# Altium PCB PinWheelV2.PcbDoc
Units mil, origin at the board's own origin, x right, y up, seen from the top; angles counter-clockwise.
Board outline 4725 x 5550 mil, 2 copper layers (Top Layer, Bottom Layer); 126 components, 95 nets, 421 pads, 10 vias.
Unrouted connection lines stored in the file: 78.
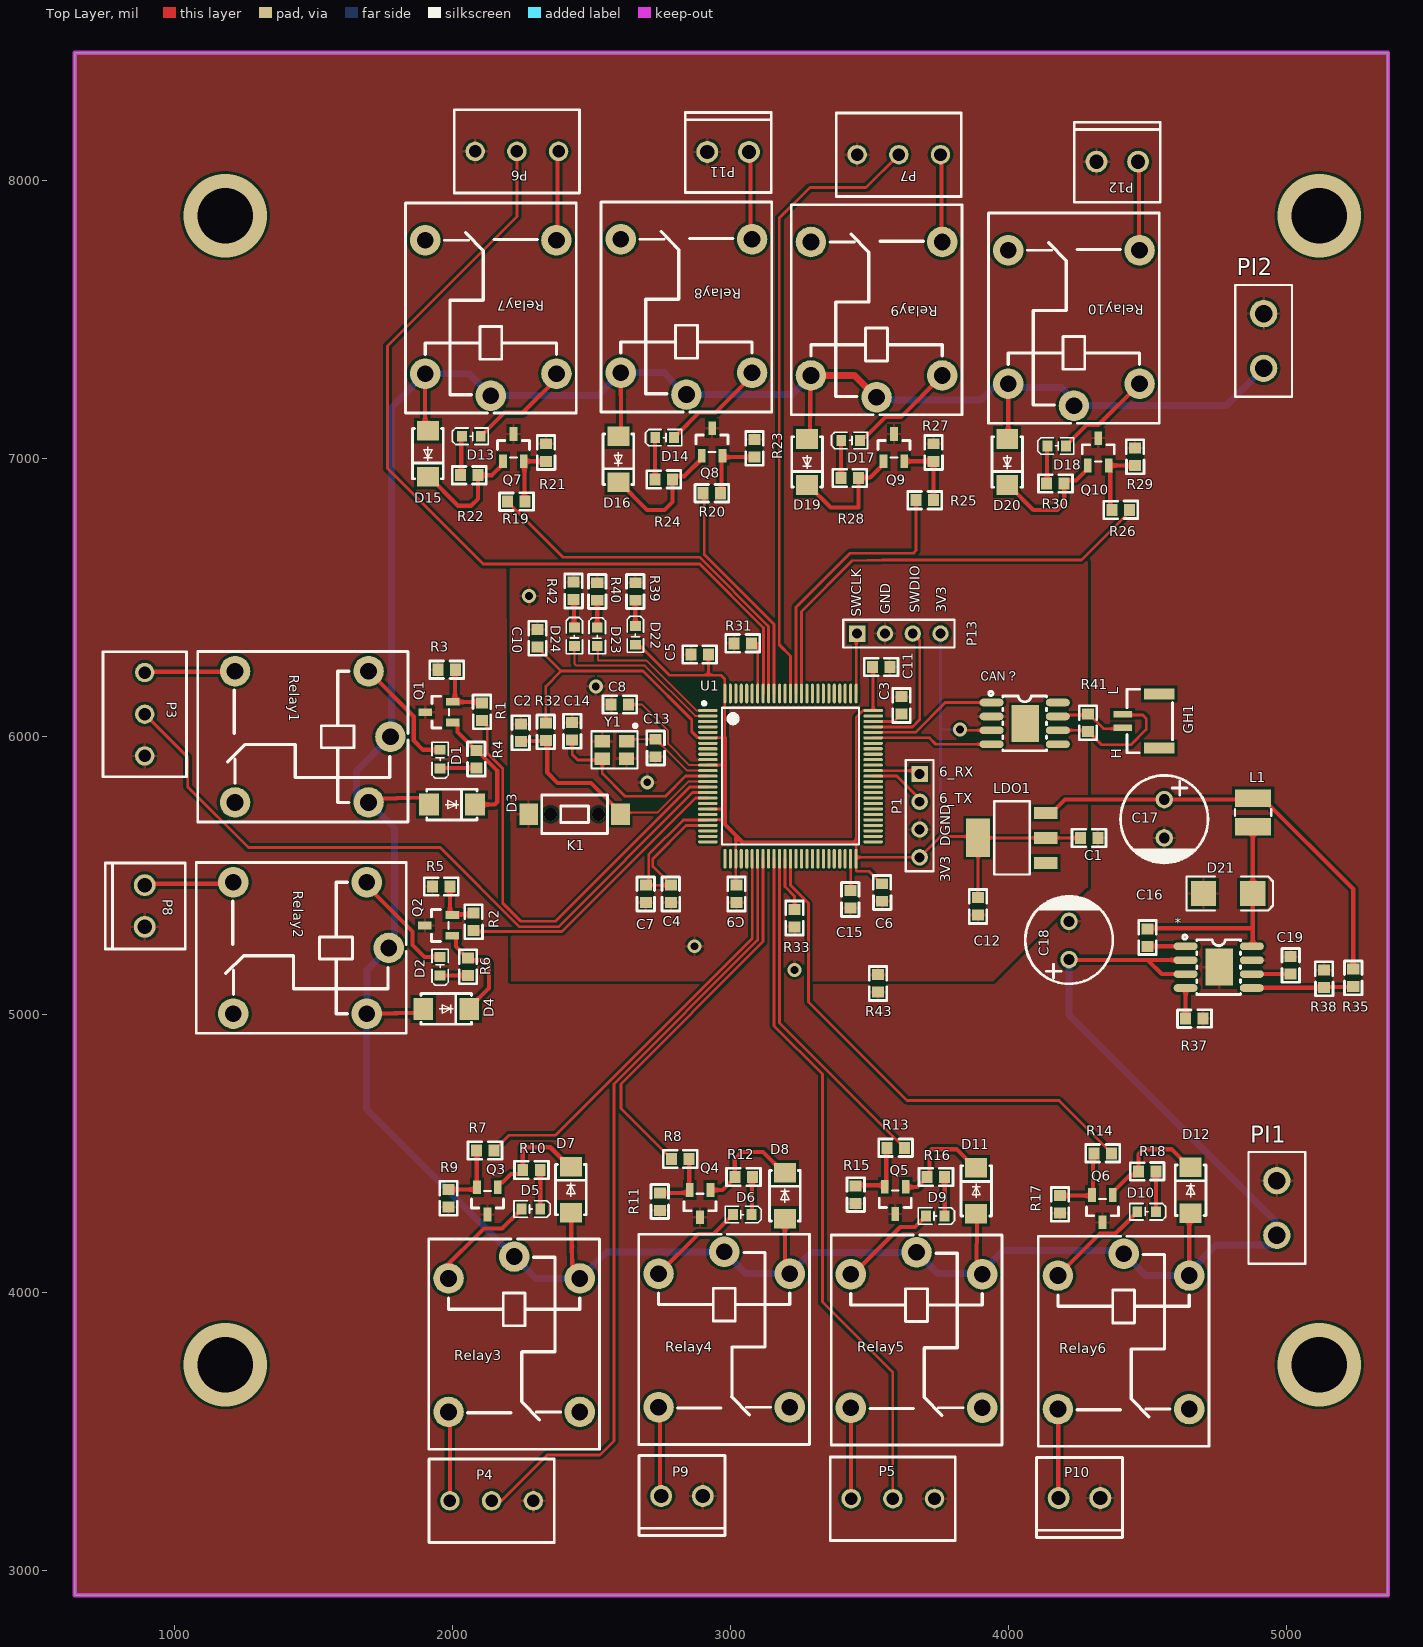
[diagram p0: Top Layer view]
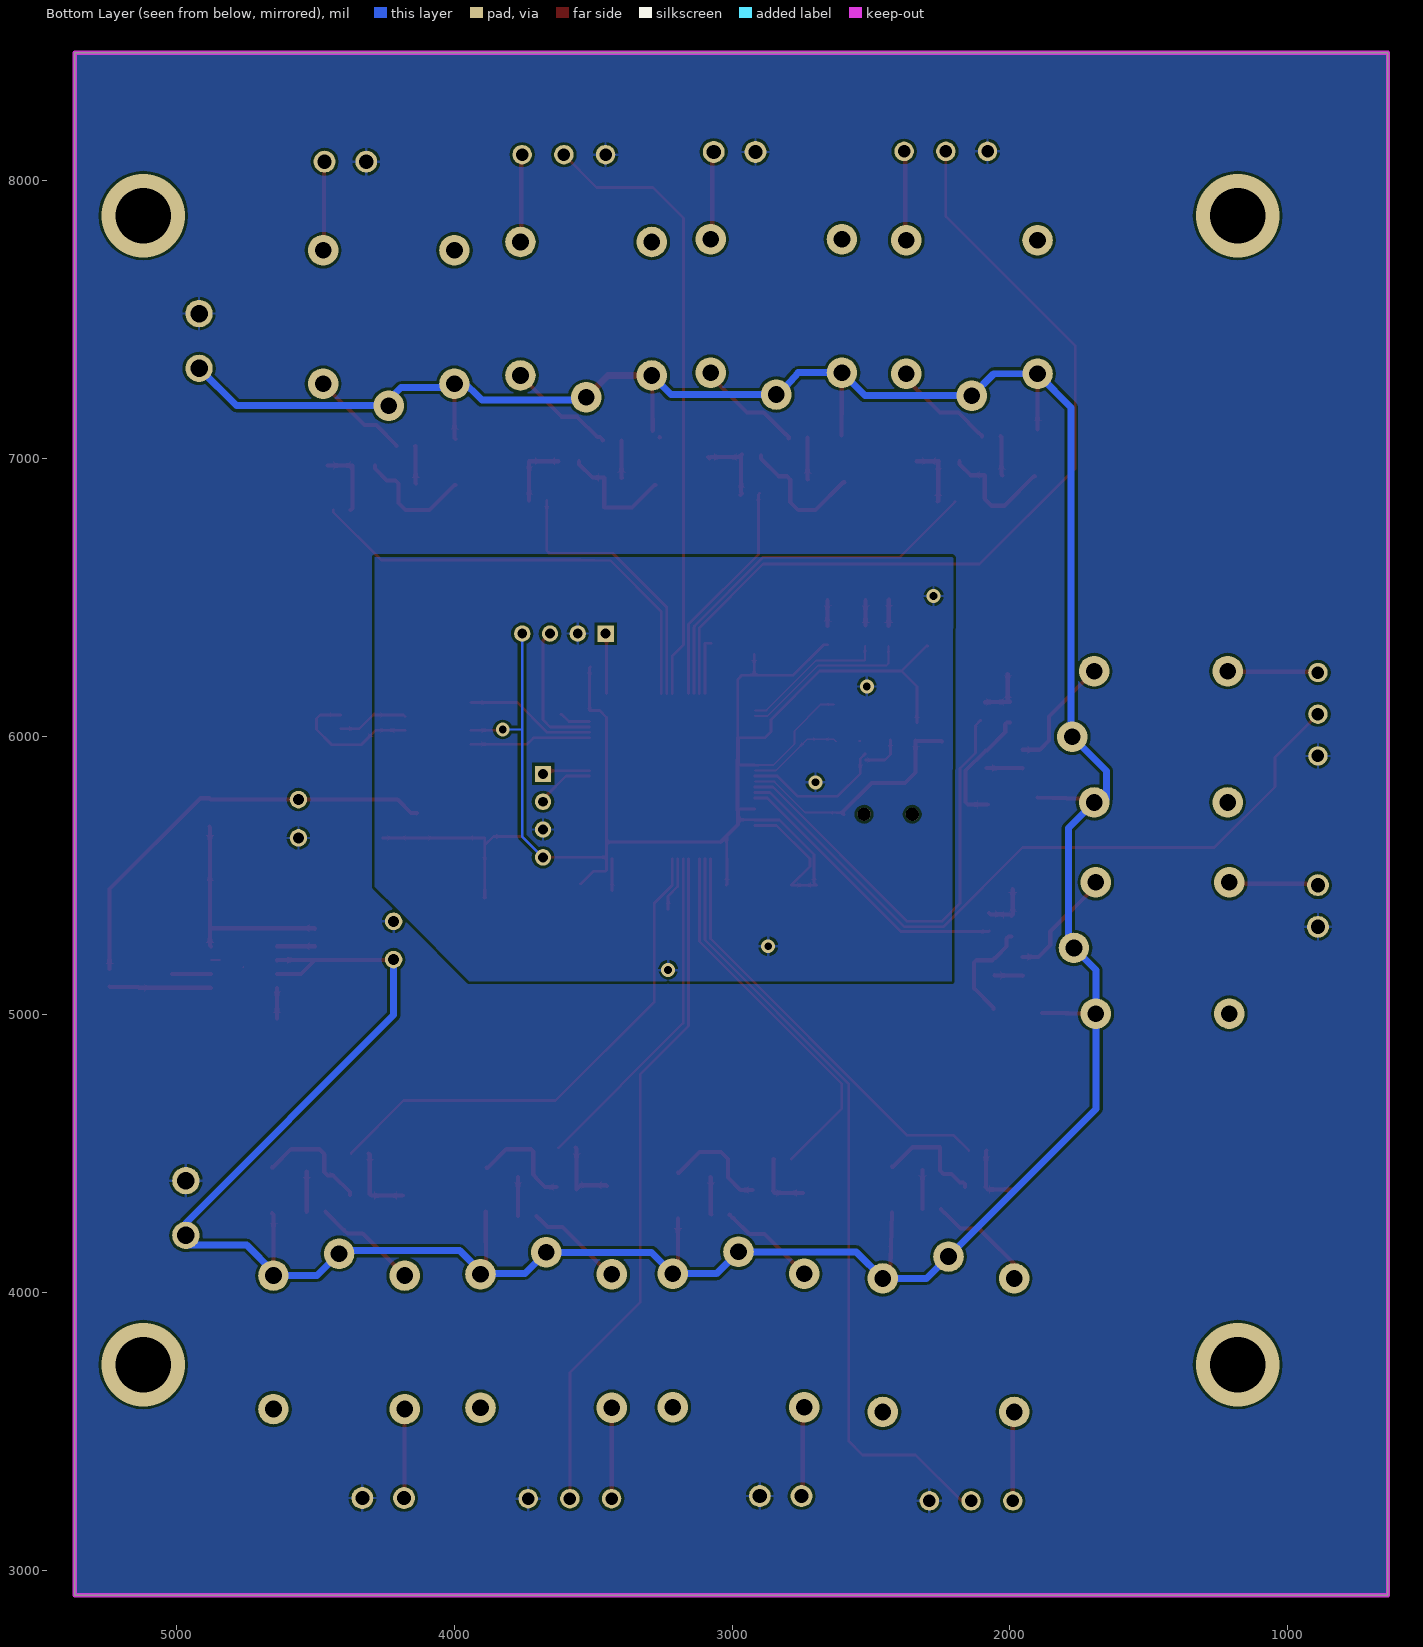
[diagram p1: Bottom Layer view, seen from below]

## Layer stack, top to bottom
Top Solder: solder mask 0.4, Solder Resist, Dk 3.5
Top Layer: signal copper 1.4
Dielectric 1: dielectric 12.6, FR-4, Dk 4.8
Bottom Layer: signal copper 1.4
Bottom Solder: solder mask 0.4, Solder Resist, Dk 3.5

## Board outline
640,2910 640,8460 5365,8460 5365,2910

## Design rules (kind name [scope] priority, off if disabled: settings)
Clearance [All] p1: gap=10 ignorepadtopadclearanceinfootprint=FALSE except(0: Arc-Hole Track-Hole SMDPad-Hole THPad-Hole Via-Hole Fill-Hole Poly-Hole Region-Hole Text-Hole; 7: Arc-Arc Arc-Track Track-Track; 8: Arc-SMDPad Track-SMDPad SMDPad-SMDPad SMDPad-THPad THPad-THPad)
PolygonConnect [All] p1: connectstyle=Relief reliefconductorwidth=10 reliefentries=4 polygonreliefangle="90 Angle" airgapwidth=10
RoutingVias [All] p1: holewidth=28 width=50 viastyle="Through Hole" minholewidth=28 minwidth=50 maxholewidth=28 maxwidth=50
SolderMaskExpansion [All] p1: expansion=4
Width [All] p1: maxlimit=100 minlimit=5 preferedwidth=10 minimp=50.000000 maximp=50.000000 favimp=50.000000
30 further rules are at their usual default settings.

## Components (designator, comment, footprint, x,y, rotation, side; value= is the part's Value field where it differs from the comment)
* "LMR14050" LMR14050 4908.69,5245.5 r270 top
C1 "Cap" "R 0603" 4355.51,5666.5 r180 top value=10uF
C2 "Cap" "R 0603" 2213.5,6079.53 r270 top value=100nF
C3 "Cap" "R 0603" 3646.5,6045.47 r90 top value=2.2uF
C4 "Cap" "R 0603" 2816.5,5367.48 r90 top value=10uF
C5 "Cap" "R 0603" 2822.48,6263.5 r0 top value=10uF
C6 "Cap" "R 0603" 3576.5,5372.48 r90 top value=10uF
C7 "Cap" "R 0603" 2726.5,5367.48 r90 top value=10uF
C8 "Cap" "R 0603" 2535.47,6083.5 r0 top value=10uF
C9 "Cap" "R 0603" 3052.39,5367.48 r90 top value=10uF
C10 "Cap" "R 0603" 2273.5,6419.53 r270 top value=10uF
C11 "Cap" "R 0603" 3607.52,6281.5 r180 top value=10uF
C12 "Cap" "R 0603" 3921.51,5322.47 r90 top value=10uF
C13 "Cap" "R 0603" 2698.5,6024.53 r270 top value=15pF
C14 "Cap" "R 0603" 2461.5,5952.48 r90 top value=15pF
C15 "Cap" "R 0603" 3462.19,5347.48 r90 top value=2.2uF
C16 "Cap" "R 0603" 4531.5,5210.47 r90 top value=0.1uF
C17 "Cap Pol1" Cap+8*11 4557.55,5704.88 r270 top value=120uF
C18 "Cap Pol1" Cap+8*11 4220,5265 r90 top value=120uF
C19 "Cap" "R 0603" 5046.5,5110.47 r90 top value=22nF
CAN？ "TCAN332GD" LMR14050 4210.69,6122.49 r270 top
D1 "LED0" "LED 0603" 1922.52,5977.44 r270 top
D2 "LED0" "LED 0603" 1922.52,5232.44 r270 top
D3 "Diode" "1N4007 D" 2085.43,5810.12 r180 top
D4 "Diode" "1N4007 D" 2065,5075 r180 top
D5 "LED0" "LED 0603" 2222.56,4267.52 r0 top
D6 "LED0" "LED 0603" 2982.56,4247.52 r0 top
D7 "Diode" "1N4007 D" 2369.88,4457.42 r270 top
D8 "Diode" "1N4007 D" 3139.88,4435.78 r270 top
D9 "LED0" "LED 0603" 3677.56,4242.52 r0 top
D10 "LED0" "LED 0603" 4437.56,4257.52 r0 top
D11 "Diode" "1N4007 D" 3828.28,4453.38 r270 top
D12 "Diode" "1N4007 D" 4599.88,4455.43 r270 top
D13 "LED0" "LED 0603" 2126.38,7112.48 r180 top
D14 "LED0" "LED 0603" 2821.38,7107.48 r180 top
D15 "Diode" "1N4007 D" 1965.99,6929.22 r90 top
D16 "Diode" "1N4007 D" 2650.99,6909.22 r90 top
D17 "LED0" "LED 0603" 3490.51,7097.48 r180 top
D18 "LED0" "LED 0603" 4232.44,7077.48 r180 top
D19 "Diode" "1N4007 D" 3330.12,6899.57 r90 top
D20 "Diode" "1N4007 D" 4050.12,6899.22 r90 top
D21 "D Schottky" SMB 4790,5435 r0 top
D22 "LED0" "LED 0603" 2689.47,6304.49 r90 top
D23 "LED0" "LED 0603" 2552.48,6299.49 r90 top
D24 "LED0" "LED 0603" 2470,6300 r90 top
GH1 "GH-1.25-2" GH1.25_2P 4427.01,5941.22 r90 top
K1 "KEY" keySMD3.5*6 2444.58,5716.1 r0 top
L1 "Inductor" "L 3.5*3*2.1" 4813.9,5643.51 r90 top value=10uH
LDO1 "AMS1117" "AMS1117 3V3" 3947.5,5768.85 r0 top
P1 "Header 4" HDR1X4 3680,5865 r270 top
P3 "Header 3" "螺旋端子 3P3.81" 741.99,6305 r0 top
P4 "Header 3" "螺旋端子 3P3.81" 1915,3100 r90 top
P5 "Header 3" "螺旋端子 3P3.81" 3358.4,3107.6 r90 top
P6 "Header 3" "螺旋端子 3P3.81" 2455.87,8255 r270 top
P7 "Header 3" "螺旋端子 3P3.81" 3830,8243.01 r270 top
P8 "Header 2" "螺旋端子 2P3.81" 1035.29,5544.9 r270 top
P9 "Header 2" "螺旋端子 2P3.81" 2670.1,3410.29 r0 top
P10 "Header 2" "螺旋端子 2P3.81" 4100.1,3403.3 r0 top
P11 "Header 2" "螺旋端子 2P3.81" 3145.77,7959.71 r180 top
P12 "Header 2" "螺旋端子 2P3.81" 4545.86,7924.66 r180 top
P13 "Header 4" HDR1X4 3455,6370 r0 top
PI1 "PowerInput" XT30 4965,4205 r180 top
PI2 "PowerInput" XT30 4917.6,7324.45 r180 top
Q1 "QNPN" MMBT2222A 2101.99,6089.92 r0 top
Q2 "QNPN" MMBT2222A 2100.39,5322.52 r0 top
Q3 "QNPN" MMBT2222A 2122.48,4480.39 r90 top
Q4 "QNPN" MMBT2222A 2887.48,4470.39 r90 top
Q5 "QNPN" MMBT2222A 3589.88,4481.99 r90 top
Q6 "QNPN" MMBT2222A 4335.08,4451.99 r90 top
Q7 "QNPN" MMBT2222A 2220.99,6888.01 r270 top
Q8 "QNPN" MMBT2222A 2935.79,6908.01 r270 top
Q9 "QNPN" MMBT2222A 3590.12,6888.01 r270 top
Q10 "QNPN" MMBT2222A 4324.92,6873.01 r270 top
R1 "Res2" "R 0603" 2073.5,6154.53 r270 top value=1.5K
R2 "Res2" "R 0603" 2043.5,5399.53 r270 top value=1.5K
R3 "Res2" "R 0603" 1912.48,6208.5 r0 top value=2K
R4 "Res2" "R 0603" 2053.5,5984.53 r270 top value=6.8K
R5 "Res2" "R 0603" 1892.48,5428.5 r0 top value=2K
R6 "Res2" "R 0603" 2023.5,5237.52 r270 top value=6.8K
R7 "Res2" "R 0603" 2050.47,4478.5 r0 top value=1.5K
R8 "Res2" "R 0603" 2884.53,4511.5 r180 top value=1.5K
R9 "Res2" "R 0603" 2016.5,4272.48 r90 top value=2K
R10 "Res2" "R 0603" 2217.48,4408.5 r0 top value=6.8K
R11 "Res2" "R 0603" 2776.5,4260.47 r90 top value=2K
R12 "Res2" "R 0603" 2980.47,4383.5 r0 top value=6.8K
R13 "Res2" "R 0603" 3527.48,4488.5 r0 top value=1.5K
R14 "Res2" "R 0603" 4272.48,4468.5 r0 top value=1.5K
R15 "Res2" "R 0603" 3481.5,4285.47 r90 top value=2K
R16 "Res2" "R 0603" 3672.48,4383.5 r0 top value=6.8K
R17 "Res2" "R 0603" 4216.5,4250.47 r90 top value=2K
R18 "Res2" "R 0603" 4432.48,4403.5 r0 top value=6.8K
R19 "Res2" "R 0603" 2295.4,6876.5 r180 top value=1.5K
R20 "Res2" "R 0603" 2998.39,6906.5 r180 top value=1.5K
R21 "Res2" "R 0603" 2304.37,7087.52 r270 top value=2K
R22 "Res2" "R 0603" 2125.4,6971.5 r180 top value=6.8K
R23 "Res2" "R 0603" 3054.37,7102.52 r270 top value=2K
R24 "Res2" "R 0603" 2825.4,6956.5 r180 top value=6.8K
R25 "Res2" "R 0603" 3764.53,6881.5 r180 top value=1.5K
R26 "Res2" "R 0603" 4337.48,6783.5 r0 top value=1.5K
R27 "Res2" "R 0603" 3698.5,7087.52 r270 top value=2K
R28 "Res2" "R 0603" 3494.53,6961.5 r180 top value=6.8K
R29 "Res2" "R 0603" 4423.5,7072.52 r270 top value=2K
R30 "Res2" "R 0603" 4234.53,6941.5 r180 top value=6.8K
R31 "Res1" "R 0603" 3109.53,6366.5 r180 top value=10K
R32 "Res1" "R 0603" 2366.5,5950.47 r90 top value=10k
R33 "Res1" "R 0603" 3261.5,5280.47 r90 top value=10K
R35 "Res1" "R 0603" 5271.5,5065.47 r90 top value=5.7K
R37 "Res1" "R 0603" 4734.53,5016.5 r180 top value=23.7K
R38 "Res1" "R 0603" 5103.5,5194.53 r270 top value=1K
R39 "Res1" "R 0603" 2688.49,6455.47 r90 top value=1K
R40 "Res1" "R 0603" 2551.5,6455.47 r90 top value=1K
R41 "Res1" "R 0603" 4317.5,5983.47 r90 top value=120
R42 "Res1" "R 0603" 2466.5,6457.48 r90 top value=1K
R43 "Res1" "R 0603" 3561.5,5045.47 r90 top value=1K
Relay1 "Relay_SonLeSRD" RePlay_SonLe 2534,5845.89 r180 top
Relay2 "Relay_SonLeSRD" RePlay_SonLe 2527.9,5086.13 r180 top
Relay3 "Relay_SonLeSRD" RePlay_SonLe 2374.13,4886.7 r270 top
Relay4 "Relay_SonLeSRD" RePlay_SonLe 3129.74,4903.69 r270 top
Relay5 "Relay_SonLeSRD" RePlay_SonLe 3821.69,4901.7 r270 top
Relay6 "Relay_SonLeSRD" RePlay_SonLe 4566.71,4897.01 r270 top
Relay7 "Relay_SonLeSRD" RePlay_SonLe 1984.17,6468.3 r90 top
Relay8 "Relay_SonLeSRD" RePlay_SonLe 2687.95,6472.04 r90 top
Relay9 "Relay_SonLeSRD" RePlay_SonLe 3372.09,6462.04 r90 top
Relay10 "Relay_SonLeSRD" RePlay_SonLe 4082.09,6432.04 r90 top
U1 "STM32F407VET6" STM32F407VET6 3462.72,6104.83 r270 top
Y1 "25MHZ" "晶振 3.2*2.5" 2665,5885 r180 top

## Footprints (in the part's own frame and the unit in brackets; to place one, negate y for a bottom-side part, rotate by r counter-clockwise, add the part's x,y. Pads: shape width x height; smd on the part's side, far side on the other; paste and mask are expansions set on the pad)
"1N4007 D" [mm]
  rect 1.8x2 smd: 1(0.138,1.4) 2(4.338,1.4)
  silkscreen extent -0.06,0 4.54,2.8
"AMS1117 3V3" [mil]
  rect 85x43 smd: 1(186.5,-224.85) 2(186.5,-133.85) 3(186.5,-43.85)
  rect 85x138 smd: 4(-57.5,-133.85)
  silkscreen extent 1,-266 129,-2
Cap+8*11 [mm]
  round 1.6 hole 1: 1(-1.725,0.062) 2(1.775,0.062)
  silkscreen extent -3.94,-3.94 4.06,4.06
GH1.25_2P [mm]
  rect 0.6x1.7 smd: 1(2.275,0.432) 2(3.525,0.432)
  rect 1x2.8 smd: 3(5.375,-2.918) 4(0.425,-2.918)
  silkscreen extent 0,-4.14 5.8,0.03
HDR1X4 [mm] "Connector; Header; 4 Position"
  rect 1.5x1.5 hole 0.9: 1(0,0)
  round 1.5 hole 0.9: 2(2.54,0) 3(5.08,0) 4(7.62,0)
  silkscreen extent -1.27,-1.27 8.89,1.27
keySMD3.5*6 [mm]
  rect 1.7x2 smd: 1(-4.357,0.099) 2(4.043,0.099)
  round 1.2 hole 1.2 unplated: ""(-2.357,0.099) ""(2.043,0.099)
  silkscreen extent -3.16,-1.65 2.84,1.85
"L 3.5*3*2.1" [mm]
  rect 1.6x3.3 smd: 1(0.8,-1.679) 2(3.4,-1.679)
  silkscreen extent 1.8,-3.33 2.4,-0.03
"LED 0603" [mm]
  rect 0.9x1 smd: 1(0.648,0.825) 2(2.348,0.825)
  silkscreen extent -0.05,0.08 3.25,1.58
LMR14050 [mm]
  oval 0.7x2.2 smd: 1(0.013,-6.901) 2(1.283,-6.901) 3(2.553,-6.901) 4(3.823,-6.901) 5(3.823,-0.856) 6(2.553,-0.856) 7(1.283,-0.856) 8(0.013,-0.856)
  rect 3.4x2.5 smd: 9(1.918,-3.828)
  silkscreen extent -1.02,-7.17 4.42,-1.88
MMBT2222A [mm] "BJT-SOT23-3"
  rect 1.25x0.7 smd: 1(-2.591,-1.014) 2(-2.591,0.886) 3(-5.09,-0.064)
  silkscreen extent -4.49,-1.52 -2.94,1.4
"R 0603" [mm]
  rect 1x1.1 smd: 1(0.877,0.8) 2(2.477,0.8)
  silkscreen extent 0.13,0 3.23,1.61
RePlay_SonLe [mil]
  round 110 hole 60: 1(1317.01,-389.11) 2(1317.01,83.29) 3(836.7,-389.13) 4(836.7,83.31) 5(757.96,-152.91)
  silkscreen extent 695,-460 1451,154
SMB [mm] "DO-214-AA/SMB; 2 C-Bend Leads; Body 5.3 x 3.6 mm, inc. leads (LxW)"
  rect 2.3x2.3 smd: 1(-2.25,0) 2(2.25,0)
  silkscreen extent -3.8,-1.55 4.1,1.55
STM32F407VET6 [mm]
  oval 0.28x1.796 smd: 1(0.289,-13.834) 2(0.789,-13.834) 3(1.289,-13.834) 4(1.789,-13.834) 5(2.289,-13.834) 6(2.789,-13.834) 7(3.289,-13.834) 8(3.789,-13.834) 9(4.289,-13.834) 10(4.789,-13.834) 11(5.289,-13.834) 12(5.789,-13.834) 13(6.289,-13.834) 14(6.789,-13.834) 15(7.289,-13.834) 16(7.789,-13.834) 17(8.289,-13.834) 18(8.789,-13.834) 19(9.289,-13.834) 20(9.789,-13.834) 21(10.289,-13.834) 22(10.789,-13.834) 23(11.289,-13.834) 24(11.789,-13.834) 25(12.289,-13.834) 51(12.289,1.266) 52(11.789,1.266) 53(11.289,1.266) 54(10.789,1.266) 55(10.289,1.266) 56(9.789,1.266) 57(9.289,1.266) 58(8.789,1.266) 59(8.289,1.266) 60(7.789,1.266) 61(7.289,1.266) 62(6.789,1.266) 63(6.289,1.266) 64(5.789,1.266) 65(5.289,1.266) 66(4.789,1.266) 67(4.289,1.266) 68(3.789,1.266) 69(3.289,1.266) 70(2.789,1.266) 71(2.289,1.266) 72(1.789,1.266) 73(1.289,1.266) 74(0.789,1.266) 75(0.289,1.266)
  oval 1.796x0.28 smd: 26(13.839,-12.284) 27(13.839,-11.784) 28(13.839,-11.284) 29(13.839,-10.784) 30(13.839,-10.284) 31(13.839,-9.784) 32(13.839,-9.284) 33(13.839,-8.784) 34(13.839,-8.284) 35(13.839,-7.784) 36(13.839,-7.284) 37(13.839,-6.784) 38(13.839,-6.284) 39(13.839,-5.784) 40(13.839,-5.284) 41(13.839,-4.784) 42(13.839,-4.284) 43(13.839,-3.784) 44(13.839,-3.284) 45(13.839,-2.784) 46(13.839,-2.284) 47(13.839,-1.784) 48(13.839,-1.284) 49(13.839,-0.784) 50(13.839,-0.284) 76(-1.261,-0.284) 77(-1.261,-0.784) 78(-1.261,-1.284) 79(-1.261,-1.784) 80(-1.261,-2.284) 81(-1.261,-2.784) 82(-1.261,-3.284) 83(-1.261,-3.784) 84(-1.261,-4.284) 85(-1.261,-4.784) 86(-1.261,-5.284) 87(-1.261,-5.784) 88(-1.261,-6.284) 89(-1.261,-6.784) 90(-1.261,-7.284) 91(-1.261,-7.784) 92(-1.261,-8.284) 93(-1.261,-8.784) 94(-1.261,-9.284) 95(-1.261,-9.784) 96(-1.261,-10.284) 97(-1.261,-10.784) 98(-1.261,-11.284) 99(-1.261,-11.784) 100(-1.261,-12.284)
  silkscreen extent -0.51,-14.33 12.54,-0.03
XT30 [mm]
  round 2.5 hole 1.6: 1(0,0) 2(0,-5)
  silkscreen extent -2.6,-7.62 2.6,2.59
"晶振 3.2*2.5" [mm]
  rect 1.4x1.15 smd: 1(0.975,-2.464) 2(3.216,-2.489) 3(3.216,-0.889) 4(1.016,-0.889)
  silkscreen extent 0.02,-4.04 4.22,0.01
"螺旋端子 2P3.81" [mm]
  round 2 hole 1.3: 1(2.029,-3.64) 2(5.839,-3.64)
  silkscreen extent 0,-7.24 7.86,0.06
"螺旋端子 3P3.81" [mil]
  round 70 hole 45: 1(150,-75) 2(150,-225) 3(150,-375)
  silkscreen extent 0,-450 300,0

## Part data
C1 C2 C3 C4 C5 C6 C7 C8 C9 C10 C11 C12 C13 C14 C15 C16 C19: "Capacitor", LatestRevisionDate=17-Jul-2002, LatestRevisionNote="Re-released for DXP Platform.", PackageDescription="Radial Cap, Thru-Hole; 2 Leads; 0.3 in Pin Spacing", PackageReference=RAD-0.3, Published=8-Jun-2000, Publisher="Altium Limited"
C17 C18: "Polarized Capacitor (Radial)", LatestRevisionDate=17-Jul-2002, LatestRevisionNote="Re-released for DXP Platform.", PackageDescription="Polarized Capacitor (Radial); 2 Leads", PackageReference=RB7.6-15, Published=8-Jun-2000, Publisher="Altium Limited"
D1 D2 D5 D6 D9 D10 D13 D14 D17 D18 D22 D23 D24: "Typical INFRARED GaAs LED", LatestRevisionDate=08-Jul-2005, LatestRevisionNote="Mech Layer 1 removed.", PackageDescription="LED; 2 Leads", PackageReference=LED-0, Published=8-Jun-2000, Publisher="Altium Limited"
D3 D4 D7 D8 D11 D12 D15 D16 D19 D20: "Default Diode", Code_JEDEC=DO-214-AB, LatestRevisionDate=17-Jul-2002, LatestRevisionNote="Re-released for DXP Platform.", PackageDescription="DO-214-AB/SMC; 2 C-Bend Leads; Body 7.9 x 5.9 mm, inc. leads (LxW)", PackageReference=SMC, PackageVersion=Sep-1996, Published=8-Jun-2000, Publisher="Altium Limited"
D21: "Schottky Diode", Code_JEDEC=DO-214-AA, LatestRevisionDate=17-Jul-2002, LatestRevisionNote="Re-released for DXP Platform.", PackageDescription="DO-214-AA/SMB; 2 C-Bend Leads; Body 5.3 x 3.6 mm, inc. leads (LxW)", PackageReference=SMB, Published=8-Jun-2000, Publisher="Altium Limited"
P1 P13: "Header, 4-Pin", LatestRevisionDate=17-Jul-2002, LatestRevisionNote="Re-released for DXP Platform.", Publisher="Altium Limited"
P3 P4 P5 P6 P7: "Header, 3-Pin", LatestRevisionDate=17-Jul-2002, LatestRevisionNote="Re-released for DXP Platform.", Publisher="Altium Limited"
P8 P9 P10 P11 P12: "Header, 2-Pin", LatestRevisionDate=17-Jul-2002, LatestRevisionNote="Re-released for DXP Platform.", Publisher="Altium Limited"
Q1 Q2 Q3 Q4 Q5 Q6 Q7 Q8 Q9 Q10: "NPN Bipolar Transistor", LatestRevisionDate=29-May-2009, LatestRevisionNote="IPC-7351 Footprint Added.", PackageDescription="3-Pin SOT-23 Package 0.95 mm Pitch, 2.4 mm Lead Span", PackageReference=SOT-23B, PackageVersion=Aug-1999, Published=8-Jun-2000, Publisher="Altium Limited"
R1 R2 R3 R4 R5 R6 R7 R8 R9 R10 R11 R12 R13 R14 R15 R16 R17 R18 R19 R20 R21 R22 R23 R24 R25 R26 R27 R28 R29 R30 R31 R32 R33 R35 R37 R38 R39 R40 R41 R42 R43: "Resistor", LatestRevisionDate=17-Jul-2002, LatestRevisionNote="Re-released for DXP Platform.", Published=8-Jun-2000, Publisher="Altium Limited"
  R1 R2 R3 R4 R5 R6 R7 R8 R9 R10 R11 R12 R13 R14 R15 R16 R17 R18 R19 R20 R21 R22 R23 R24 R25 R26 R27 R28 R29 R30: PackageDescription="Axial Device, Thru-Hole; 2 Leads; 0.4 in Pin Spacing", PackageReference=AXIAL-0.4
  R31 R32 R33 R35 R37 R38 R39 R40 R41 R42 R43: PackageDescription="Axial Device, Thru-Hole; 2 Leads; 0.3 in Pin Spacing", PackageReference=AXIAL-0.3
Y1: library part ABM11AIG-25.000MHZ-4Z-T3, "Crystal or Oscillator", Manufacturer_Name=ABRACON, Mouser Part Number=815-M11AIG-25-4ZT3, Datasheet Link=https://componentsearchengine.com/Datasheets/1/ABM11AIG-25.000MHZ-4Z-T3.pdf, Height=0.55mm, Manufacturer_Part_Number=ABM11AIG-25.000MHZ-4Z-T3, Mouser Price/Stock=https://www.mouser.com/Search/Refine.aspx?Keyword=815-M11AIG-25-4ZT3
L1: Code_IEC=1005, Code_JEITA=0402, LatestRevisionDate=29-May-2009, LatestRevisionNote="IPC-7351 Footprint Added.", PackageDescription="Chip Inductor", PackageReference=0402-A, Published=8-Jun-2000, Publisher="Altium Limited"

## Via types
v1: diameter 50, hole 28, Top Layer to Bottom Layer, 6 vias
v2: diameter 300, hole 200, Top Layer to Bottom Layer, 4 vias

## Nets (pads, with @x,y where several pads share a name; then routed paths per layer and width w, separated by ;. In a path a pad name is that pad's centre, name@x,y a point inside that pad or via, vN(x,y) a via of type N, cw(c..) or ccw(c..) an arc to the next point about the centre after c; other vN are vias at no path point)
3V3: C1.2 C4.2 C5.2 C6.2 C7.2 C8.2 C9.2 C10.2 C11.2 C12.2 CAN？.3 D22.1 LDO1.2 LDO1.4 P1.4 P13.4 R32.2 U1.6 U1.11 U1.19 U1.21 U1.22 U1.28 U1.50 U1.75 U1.100 | length 7144.3
  Top Layer w7: C8.2 2680,6115 2775,6020 2775,5973.13 2851.33,5896.81 U1.11@2917.87,5896.81
  Top Layer w10: C10.2@2295,6325 2300,6325 2390,6235 ; R32.2 2335,6180 2390,6235 ; D22.1 2670,6330 2780,6220 2920,6220 ; C7.2 C7.2@2696.97,5465 ; U1.11@2917.87,5896.81 U1.11 2918.27,5896.81 2973.09,5896.81 2979.09,5912.6 2980,5915 ; U1.22 2917.87,5679.87 2839.87,5679.87 2720,5560 2720,5531.97 2786.97,5465 C4.2 C7.2@2696.97,5465 ; U1.19 2918.27,5739.33 2979.09,5739.33 ; C5.2 2920,6220 ; 2980,5699.96 2979.09,5699.96 2918.27,5699.96 U1.21 2829.76,5699.76 2705,5575 2705,5473.03 C7.2@2696.97,5465 ; 3018.66,5643.47 3018.66,5560.2 U1.28 3018.46,5467.44 C9.2 ; 3042.12,5620 3451.53,5620 ; C11.2 3512.55,6247.45 U1.75 3512.35,6093.26 3476.02,6093.26 3451.53,6068.78 3451.53,5620 ; C6.2 3543.03,5470 3498.03,5515 3455,5515 3451.53,5518.47 U1.50 U1.50@3451.53,5564.53 ; v1@3828.01,6021.99 CAN？.3 ; C12.2 LDO1.4 ; C1.2 LDO1.2 LDO1.4 ; 2390,6235 2685,6235 2860,6060 2860,6016.77 2881.54,5995.24 2917.87,5995.24 U1.6 2918.27,5995.24 2979.09,5995.24 ; 2920,6220 2965,6220 2979.09,6205.91 U1.100 2979.09,5995.24 ; 2979.09,5995.24 2979.09,5994.09 2980.24,5995.24 2979.09,5995.24 ; U1.50@3451.53,5564.53 3452,5565 P1.4 3755,5640 3858.5,5640 3890,5608.5 LDO1.4 ; U1.50@3451.53,5564.53 3451.53,5620
  Top Layer w15: 2979.09,5912.6 2979.09,5994.09 ; 2980,5915 2980,5735.91 2979.09,5735 2979.09,5699.96 2979.09,5683.03 3018.66,5643.47 3042.12,5620
  Bottom Layer w7: 3760,6025 v1(3825,6025)
  Bottom Layer w10: P1.4 3755,5640 P13.4@3755,6365
5V: C17.1 L1.2 LDO1.3 R35.2 | length 1552.6
  Top Layer w15: LDO1.3@4135.27,5723.73 LDO1.3 4155,5725 4202.8,5772.8 C17.1 4875.45,5772.8 L1.2 4913.45,5777.35 5240,5450.8 R35.2
24V: *.2 *.3 C18.1 D3.2 D4.2 D7.2 D8.2 D11.2 D12.2 D15.2 D16.2 D19.2 D20.2 PI1.1 PI2.1 Relay1.4 Relay1.5 Relay2.4 Relay2.5 Relay3.4 Relay3.5 Relay4.4 Relay4.5 Relay5.4 Relay5.5 Relay6.4 Relay6.5 Relay7.4 Relay7.5 Relay8.4 Relay8.5 Relay9.4 Relay9.5 Relay10.4 Relay10.5 | length 14032.5
  Top Layer w15: Relay2.4 1790,5004.08 ; Relay1.4@1695,5775 1697,5775.05 1797.5,5777.5 D3.2@1900,5780 ; Relay1.5 Relay1.5@1786.94,5989.7 ; Relay1.5@1795,6005 Relay1.5@1795.07,5999.01 ; 1800,5005 1790,5004.08 ; D4.2@1884.94,5005.06 1800.01,5004.18 1790,5004.08 ; D15.2@1900.87,7105 Relay7.4 ; Relay7.5@2144.98,7223.37 Relay7.5@2148.35,7220 ; D7.2 2428.52,4164.97 ; 2430,4165 2428.52,4164.97 ; Relay3.4@2431.09,4076.2 2428.52,4164.97 ; Relay8.4@2595.87,7310 2604.15,7307.24 Relay8.4@2604.65,7307.07 ; Relay8.4 Relay8.4@2604.65,7307.07 ; D16.2@2605.87,7083.01 2605.11,7223.5 ; 2605.87,7220.07 2605.45,7223.5 ; Relay4.4@3195,4090 D8.2 ; D19.2@3260,7075.35 D19.2@3261.35,7076.63 ; Relay9.4@3275.58,7270.61 Relay9.4@3275.96,7284.95 ; D19.2@3285,7100 3286.41,7194.4 Relay9.4@3287.82,7288.8 ; Relay5.4@3885.03,4068.57 3885.85,4282.59 3885.87,4286.08 D11.2@3885.89,4291.1 ; Relay5.4@3887.47,4058.18 3887.49,4065.07 Relay5.4@3887.51,4068.56 ; Relay5.4@3887.53,4073.49 Relay5.4@3902.49,4068.5 ; D20.2 3998.78,7073.78 Relay10.4 ; C18.1 4218.58,5196.04 4500,5196.04 ; *.3 4551.04,5145 4500,5196.04 ; *.2 4635.96,5196.04 4500,5196.04 ; Relay6.4 4650.02,4279.67 D12.2 ; Relay8.4@2604.66,7307.07 2605.08,7223.5 ; Relay8.4@2604.65,7307.07 2604.65,7228.5 2605.08,7223.5 ; 2605.11,7223.5 2605.45,7223.5 ; 2605.11,7223.5 2605.09,7226.39 2605.45,7223.5
  Top Layer w25: Relay9.4 3446.26,7298.74 Relay9.5
  Bottom Layer w25: Relay1.4@1653.54,5775.86 1653.54,5876.3 Relay1.5@1769.8,5992.56 ; Relay2.4@1690,5012.82 1690,4659.96 Relay3.5 2299.96,4050 Relay3.4 2553.17,4145.73 Relay4.5 3055.57,4066.99 Relay4.4 3289.8,4143.74 Relay5.5 ; Relay2.4 1691.2,5160.3 Relay2.5 1790,5259.1 1790,5669.88 Relay1.4 ; Relay1.5@1780,5995 1780,5998.8 1780,7184.13 Relay7.4@1895.32,7299.45 ; Relay7.4@1900,7299.45 Relay7.4@1895.32,7299.45 ; Relay8.5@2840.87,7220 2835.9,7225.6 2762.13,7308.74 Relay8.4 2522.17,7226.26 Relay7.5 2058.35,7305 Relay7.4 Relay7.4@1895.32,7299.45 ; Relay8.5 3220.04,7230 Relay9.4 ; Relay9.5@3524.04,7210.05 3900.05,7210.05 Relay10.4@3975,7285 ; Relay5.5@3666.27,4147.24 3745.01,4068.5 Relay5.4@3902.49,4068.5 ; Relay5.4@3900.02,4070.32 3979.7,4150 4374.95,4150 Relay6.5@4390,4134.95 ; Relay10.4@4032.82,7255.78 4190.3,7255.78 Relay10.5@4256.09,7190 ; C18.1 4217.54,4997.46 4965,4250 4965,4180 4955,4170 4746.06,4170 4650.02,4073.96 Relay6.4 4492.54,4060.32 Relay6.5 ; Relay10.5 Relay10.5@4256.09,7190 ; Relay6.5@4390,4140 Relay6.5@4390,4134.95 ; Relay6.5@4399.87,4134.95 Relay6.5@4390,4134.95 ; Relay6.5@4413.82,4134.93 Relay6.5@4390,4134.93 ; PI2.1 4915,7321.85 4783.15,7190 Relay10.5@4256.09,7190
CAN1_H: CAN？.7 GH1.1 R41.2 | length 259.1
  Top Layer w10: CAN？.7 4182,6076.99 4286.01,6076.99 R41.2@4290,6076.99 ; R41.2 4287.97,6080.98 4341,6027.96 GH1.1@4408.11,6027.96
CAN1_L: CAN？.6 GH1.2 R41.1 | length 494.2
  Top Layer w10: CAN？.6 4282.01,6021.99 R41.1 4334,5970 4440,5970 4495,6025 4495,6065 4482.83,6077.17 GH1.2@4408.11,6077.17
CAN1_RXD: CAN？.4 U1.70 | length 436
  Top Layer w10: U1.70 3714.96,5995.04 3738.01,5971.99 CAN？.4
CAN1_TXD: CAN？.1 U1.71 | length 470.9
  Top Layer w10: U1.71 3664.72,6014.72 3771.99,6121.99 CAN？.1
DGND: C2.1 C3.2 C4.1 C5.1 C6.1 C7.1 C8.1 C9.1 C10.1 C11.1 C12.1 C13.2 C14.2 C15.1 CAN？.2 K1.1 P1.3 P13.2 R31.2 R33.1 R39.2 R40.2 R42.2 R43.2 U1.10 U1.20 U1.27 U1.74 U1.99 Y1.2 Y1.4 | length 4.9
  Top Layer w7: Y1.2 Y1.2@2543.3,5983
  other v1: 3230,5160 2870,5245 2700,5835 2515,6180 2275,6505
EN11: R1.2 U1.15 | length 1654.2
  Top Layer w10: R1.2 2106.97,6057.01 2124.15,6039.83 2124.15,5941.1 2180,5885.25 2180,5400 2245,5335 2370,5335 2852.87,5817.87 U1.15
EN12: R2.2 U1.17 | length 1042.9
  Top Layer w10: R2.2@2075,5300 2077,5298 2393,5298 2873.5,5778.5 U1.17
EN21: R7.2 U1.31 | length 1532.9
  Top Layer w10: R7.2 2202.99,4565 2370,4565 3077.51,5272.51 U1.31
EN22: R8.2 U1.33 | length 1367.4
  Top Layer w10: R8.2 2605,4662.01 2605,4750 3116.88,5261.88 U1.33
EN31: R13.2 U1.36 | length 1226
  Top Layer w10: U1.36 3175.94,4969.06 R13.2
EN32: R14.2 U1.38 | length 1858.7
  Top Layer w10: U1.38 3215.31,5464.69 3280,5400 3280,5045 3635,4690 4181.97,4690 4370,4501.97 R14.2
EN41: R19.2 U1.92 | length 1367.5
  Top Layer w10: R19.2 2197.88,6843.03 2395.91,6645 2887.83,6645 3134.93,6397.9 3134.93,6395.07 3136.57,6393.43 U1.92
EN42: R20.2 U1.91 | length 826.3
  Top Layer w10: R20.2 2905,6870.87 2905,6655 3156.25,6403.75 U1.91
EN51: R25.2 U1.87 | length 1008.1
  Top Layer w10: U1.87 3235,6465 3429.27,6659.27 3657.46,6659.27 3667.01,6668.81 R25.2
EN52: R26.2 U1.86 | length 1624.9
  Top Layer w10: U1.86 3254.68,6449.68 3437.43,6632.43 3545.66,6635 4261.97,6635 R26.2@4435,6808.03 ; R26.2@4435,6813.03 R26.2
GND: *.7 *.9 C1.1 C17.2 C18.2 C19.2 D21.1 LDO1.1 P3.3 P4.3 P5.3 P6.3 P7.3 P8.2 P9.2 P10.2 P11.2 P12.2 PI1.2 PI2.2 Q1.3 Q2.3 Q3.3 Q4.3 Q5.3 Q6.3 Q7.3 Q8.3 Q9.3 Q10.3 R3.1 R5.1 R9.1 R11.1 R15.1 R17.1 R21.1 R23.1 R27.1 R29.1 R37.1 R38.1 R43.1 | length 33
  Top Layer w7: *.9 *.9@4758.28,5170.28 ; *.7@4842.43,5195 *.7
LED1: D23.1 U1.1 | length 523.8
  Top Layer w7: D23.1 2521.97,6325 2521.97,6274.02 2696.18,6274.02 2876.74,6093.46 U1.1
LED2: D24.1 U1.2 | length 621.7
  Top Layer w7: D24.1 2437.52,6262.48 2445,6255 2691.16,6255 2872.22,6073.94 2917.91,6073.94 U1.2
Net*_1: *.1 C16.1 | length 137
  Top Layer w15: C16.1 *.1
Net*_4: *.4 R37.2 | length 110
  Top Layer w15: R37.2 *.4
Net*_5: *.5 R35.1 R38.2 | length 367.1
  Top Layer w15: *.5 4876.01,5096.01 5134,5096.01 R38.2 5136.5,5098.51 5238.51,5098.51 R35.1
Net*_6: *.6 C19.1 | length 140
  Top Layer w15: *.6 C19.1
Net*_8: *.8 C16.2 D21.2 L1.1 | length 811.5
  Top Layer w15: C16.2 4502.01,5310 4878.58,5310 ; *.8 4878.58,5248.58 4878.58,5310 ; L1.1 4878.58,5673.58 D21.2 4878.58,5310
NetC3_1: C3.1 U1.73 | length 113.2
  Top Layer w10: U1.73 3587.12,6054.09 3613.03,6080 C3.1
NetC15_2: C15.2 U1.49 | length 115.5
  Top Layer w10: C15.2 3431.85,5446.15 U1.49
NetD1_1: D1.1 Relay1.3 | length 426.1
  Top Layer w15: Relay1.3 1860,6072.32 1860,5985 1893.07,5951.93 D1.1
NetD1_2: D1.2 R4.2 | length 130.8
  Top Layer w15: D1.2 1956.01,5886.01 2084,5886.01 R4.2
NetD2_1: D2.1 Relay2.3 | length 410.9
  Top Layer w15: Relay2.3 1691.2,5462.49 1855,5298.69 1855,5250 1898.07,5206.93 D2.1
NetD2_2: D2.2 R6.2 | length 102.8
  Top Layer w15: D2.2@1954.01,5139.01 D2.2 R6.2 R6.2@2056,5141
NetD3_1: D3.1 Q1.1 R4.1 | length 444.8
  Top Layer w15: Q1.1 2010.83,6050 2017.11,6043.72 2017.11,6015.93 2083.03,5950 R4.1 2086.97,5950 2160,5876.97 2160,5763.79 2151.21,5755 D3.1
NetD4_1: D4.1 Q2.1 R6.1 | length 386.8
  Top Layer w15: Q2.1@1995,5280 2005.83,5280 2012.11,5273.72 2012.11,5243.91 2053.03,5202.99 R6.1 2062.99,5195 2121.21,5195 2130,5186.21 2130,5094.25 2059.57,5023.82 D4.1
NetD5_1: D5.1 Relay3.3 | length 383.3
  Top Layer w15: Relay3.3@1958.65,4076.2 2112.44,4230 2178.07,4230 2235.89,4287.81 2237.86,4287.81 2248.07,4298.03 D5.1
NetD5_2: D5.2 R10.2 | length 140
  Top Layer w15: D5.2 R10.2
NetD6_1: D6.1 Relay4.3 | length 356.9
  Top Layer w15: Relay4.3 2883.62,4210 2938.07,4210 2995.89,4267.81 2997.86,4267.81 3008.07,4278.03 D6.1
NetD6_2: D6.2 R12.2 | length 136.2
  Top Layer w15: D6.2 3076.49,4281.49 3076.49,4413.5 R12.2
NetD7_1: D7.1 Q3.1 R10.1 | length 406.6
  Top Layer w15: Q3.1 2162.4,4389.23 2168.68,4395.51 2179.51,4395.51 2209.85,4425.85 2239.83,4425.85 2252.01,4438.03 R10.1 2252.01,4522.01 2351.04,4522.01 2421.07,4451.99 D7.1
NetD8_1: D8.1 Q4.1 R12.1 | length 394.3
  Top Layer w15: Q4.1 2970.37,4368.4 3015,4413.03 R12.1 3015,4480 3040,4505 3116.42,4505 3191.07,4430.35 D8.1
NetD9_1: D9.1 Relay5.3 | length 360.4
  Top Layer w15: Relay5.3@3430.09,4066.82 3442.12,4066.82 3610.31,4235 3663.07,4235 3690.89,4262.81 3692.86,4262.81 3703.07,4273.03 D9.1
NetD9_2: D9.2 R16.2 | length 140
  Top Layer w15: D9.2 R16.2
NetD10_1: D10.1 Relay6.3 | length 380.6
  Top Layer w15: Relay6.3 4328.76,4211.49 4383.71,4211.49 4397.21,4225 4398.07,4225 D10.1
NetD10_2: D10.2 R18.2 | length 145
  Top Layer w15: D10.2 R18.2
NetD11_1: D11.1 Q5.1 R16.1 | length 385.3
  Top Layer w15: Q5.1@3632.4,4378.4 3672.38,4378.4 3707.01,4413.03 R16.1 3715,4422.99 3715,4506.21 3723.79,4515 3812.42,4515 3879.47,4447.95 D11.1
NetD12_1: D12.1 Q6.1 R18.1 | length 419.1
  Top Layer w15: Q6.1 4375,4360.83 4435.02,4420.85 4454.83,4420.85 4467.01,4433.03 R18.1 4467.01,4497.01 4485,4515 4586.07,4515 4651.07,4450 D12.1
NetD13_1: D13.1 Relay7.3 | length 395.6
  Top Layer w15: D13.1 2100.87,7081.97 2111.08,7092.19 2113.05,7092.19 2185.87,7165 2252.08,7165 2385.87,7298.79 2385.87,7305 Relay7.3
NetD13_2: D13.2 R22.2 | length 142.5
  Top Layer w15: R22.2 2030.91,6943.03 2030.91,7076.97 D13.2
NetD14_1: D14.1 Relay8.3 | length 388.5
  Top Layer w15: D14.1@2795.87,7073.03 D14.1 2795.87,7076.97 2806.08,7087.19 2808.05,7087.19 2885.87,7165 2945.87,7165 3077.09,7296.22 Relay8.3
NetD14_2: D14.2 R24.2 | length 151.9
  Top Layer w15: R24.2@2728.41,6924.47 R24.2 2728.41,6925.53 2728.41,7074.47 D14.2 D14.2@2728.41,7075.53
NetD15_1: D15.1 Q7.1 R22.1 | length 437.9
  Top Layer w15: D15.1@1912.22,6936 D15.1 1914.8,6934.65 2019.45,6830 2065.87,6830 2090.87,6855 R22.1 2141.89,6940 2181.07,6979.17 Q7.1
NetD16_1: D16.1 Q8.1 R24.1 | length 476
  Top Layer w15: D16.1 2599.8,6914.65 2699.45,6815 2762.08,6815 2790.87,6843.79 R24.1 2802.23,6936.36 2833.05,6936.36 2895.87,6999.17 Q8.1
NetD17_1: D17.1 Relay9.3 | length 438.6
  Top Layer w15: D17.1 3465,7066.97 3475.22,7077.19 3484.72,7077.19 3557.53,7150 3612.48,7150 Relay9.3 ; Relay9.3@3760.26,7288.8 3785.97,7288.8 Relay9.3@3799.19,7302.02
NetD17_2: D17.2 R28.2 | length 135.4
  Top Layer w15: R28.2 3397.54,6930.53 3397.54,7064.47 D17.2
NetD18_1: D18.1 Relay10.3 | length 358.1
  Top Layer w15: D18.1 4206.93,7046.97 4279.96,7120 4322.48,7120 Relay10.3
NetD18_2: D18.2 R30.2 | length 136.2
  Top Layer w15: R30.2 4138.51,6911.5 4138.51,7043.51 D18.2
NetD19_1: D19.1 Q9.1 R28.1 | length 446.2
  Top Layer w15: D19.1 3278.93,6905 3360.15,6823.79 3460,6823.79 R28.1 3461.16,6931.16 3502.18,6931.16 3550.2,6979.17 Q9.1
NetD20_1: D20.1 Q10.1 R30.1 | length 440.8
  Top Layer w15: D20.1 3998.93,6904.65 4088.58,6815 4175,6815 4200,6840 R30.1 4211.36,6921.36 4242.19,6921.36 4285,6964.17 Q10.1
NetD22_2: D22.2 R39.1 | length 100.1
  Top Layer w5: D22.2@2651.99,6401.93 D22.2
  Top Layer w15: D22.2 R39.1
NetD23_2: D23.2 R40.1 | length 90
  Top Layer w15: D23.2@2520,6400 R40.1
NetD24_2: D24.2 R42.1 | length 95.6
  Top Layer w15: R42.1 2436.26,6490.75 2436.26,6398.7 D24.2@2437.52,6397.44
NetQ1_2: Q1.2 R1.1 R3.2 | length 195.3
  Top Layer w15: R3.2@2007.99,6225 2007.99,6131.08 2001.71,6124.8 Q1.2 2000.91,6123.89 2007.99,6123.89 2089.1,6123.89 R1.1@2090,6122.99
NetQ2_2: Q2.2 R2.1 R5.2 | length 181.5
  Top Layer w15: R5.2@1990,5450 1990,5359.8 1995,5354.8 2000.1,5359.9 2069.9,5359.9 R2.1
NetQ3_2: Q3.2 R7.1 R9.2 | length 229
  Top Layer w15: R9.2 Q3.2@2081.32,4370 ; R7.1 2086.3,4508.7 2086.3,4379.7 Q3.2
NetQ4_2: Q4.2 R8.1 R11.2 | length 227
  Top Layer w15: R11.2 2846.32,4357.98 2852.6,4364.26 2851.3,4365.56 2851.3,4478.7 R8.1
NetQ5_2: Q5.2 R13.1 R15.2 | length 268.6
  Top Layer w15: R15.2 R15.2@3453.31,4386.29 ; R15.2@3453.31,4385 3544.59,4385 3559.81,4369.78 3559.81,4517.79 R13.1
NetQ6_2: Q6.2 R14.1 R17.2 | length 268.9
  Top Layer w15: R17.2 4298.19,4347.99 Q6.2 4303.61,4353.41 4303.61,4496.59 R14.1
NetQ7_2: Q7.2 R19.1 R21.2 | length 227.1
  Top Layer w15: R19.1 2258.37,6847.5 2258.37,6987.5 Q7.2 R21.2
NetQ8_2: Q8.2 R20.1 R23.2 | length 269.9
  Top Layer w15: Q8.2@2964.47,7013.22 Q8.2@2965.96,7014.71 ; R20.1@2970.06,6868.8 R20.1 2967.26,6878.41 2967.26,7006.59 Q8.2 2975.66,7005 3076.46,7005 3081.16,7000.3 R23.2
NetQ9_2: Q9.2 R25.1 R27.2 | length 245
  Top Layer w15: Q9.2 R27.2 R25.1
NetQ10_2: Q10.2 R26.1 R29.2 | length 251.5
  Top Layer w15: R26.1 4365.91,6821.11 4365.91,6974.83 4366.08,6975 R29.2
NetR31_1: R31.1 U1.94 | length 202.7
  Top Layer w10: R31.1 3097.2,6335 U1.94
NetR33_2: R33.2 U1.37 | length 196.3
  Top Layer w10: U1.37 3195.63,5459.62 3230,5425.25 R33.2
OSC_IN: C13.1 U1.12 Y1.1 | length 341.6
  Top Layer w7: Y1.1 2634.62,5990 C13.1 2843.08,5876.92 U1.12
OSC_OUT: C14.1 U1.13 Y1.3 | length 673.4
  Top Layer w10: C14.1@2431.97,5987.01 C14.1 2430,5935 2450,5915 Y1.3@2519.4,5915 ; Y1.3@2520.74,5937.64 Y1.3 2538.38,5866.62 2620,5785 2765,5785 2837.24,5857.24 U1.13
OUT11: P3.1 Relay1.1 | length 327.1
  Top Layer w15: P3.1 894.49,6232.5 1214.49,6232.5 Relay1.1
OUT12: P8.1 Relay2.1 | length 323.1
  Top Layer w15: P8.1 897.11,5470.12 1205.77,5470.12 Relay2.1
OUT21: P4.1 Relay3.1 | length 343.9
  Top Layer w15: Relay3.1@1958.67,3595.89 1990,3564.56 P4.1@1990,3265
OUT22: P9.1 Relay4.1 | length 323.6
  Top Layer w15: Relay4.1 2745.31,3581.99 2745.31,3271.67 P9.1
OUT31: P5.1 Relay5.1 | length 327.4
  Top Layer w15: Relay5.1 3432.99,3584.28 3432.99,3258.01 P5.1
OUT32: P10.1 Relay6.1 | length 321
  Top Layer w15: Relay6.1 4178.8,3578.8 4178.8,3261.2 P10.1
OUT41: P6.1 Relay7.1 | length 322.8
  Top Layer w15: Relay7.1 2377.08,7789.1 2377.08,8101.21 P6.1
OUT42: P11.1 Relay8.1 | length 318.6
  Top Layer w15: P11.1 3071.47,8097.41 3071.47,7794.65 Relay8.1
OUT51: P7.1 Relay9.1 | length 316.5
  Top Layer w15: P7.1 3758.1,8089.91 3758.1,7782.15 Relay9.1
OUT52: P12.1 Relay10.1 | length 321.1
  Top Layer w15: P12.1 4468.58,8065.34 4468.58,7751.67 Relay10.1
RESET: C2.2 K1.2 R32.1 U1.14 | length 911.5
  Top Layer w7: K1.2@2603.74,5725.91 2735.91,5725.91 2847.55,5837.55 U1.14
  Top Layer w10: K1.2@2596.42,5718.58 2603.74,5725.91 K1.2
  Top Layer w15: C2.2 2246.5,5983.51 2338.51,5983.51 2340,5985 2340,5870 2377.65,5832.35 2497.3,5832.35 K1.2@2603.74,5725.91
Signal1: P3.2 U1.16 | length 2605.8
  Top Layer w10: P3.2 1046.73,5925.26 1046.73,5818.27 1265,5600 1955,5600 2240,5315 2380,5315 2863.18,5798.18 U1.16
Signal2: P4.2 U1.32 | length 2838.3
  Top Layer w10: P4.2 2175,3250 2340,3415 2530,3415 2580,3465 2580,4750 3097.2,5267.2 U1.32
Signal3: P5.2 U1.35 | length 2479.3
  Top Layer w10: U1.35 3156.25,4958.75 3330,4785 3330,3965 3583.4,3711.6 P5.2
Signal4: P6.2 U1.93 | length 3160.1
  Top Layer w10: P6.2 2230.87,7870.49 1765,7404.62 1765,6965 2110,6620 2888.79,6620 3117.93,6390.86 3117.93,6275.43 U1.93@3117.93,6154.48
Signal5: P7.2 U1.88 | length 2251.7
  Top Layer w10: U1.88 3215.31,6289.69 3175,6330 3175,7865 3285,7975 3486.99,7975 P7.2
SWCLK: P13.1 U1.76 | length 215.5
  Top Layer w10: U1.76 P13.1@3451.53,6370
SWDIO: P13.3 U1.72 | length 498.4
  Top Layer w10: U1.72 3654.41,6034.41 3680,6060 3680,6345 P13.3
USART6_RX: P1.1 U1.64 | length 172.4
  Top Layer w5: P1.1@3668.08,5876.92 P1.1
  Top Layer w10: U1.64 P1.1@3668.08,5876.92
USART6_TX: P1.2 U1.63 | length 211.5
  Top Layer w10: U1.63 3597.76,5857.24 3672.16,5782.84 3672.16,5772.84 P1.2
pads on no net: CAN？.5 CAN？.8 CAN？.9 GH1.3 GH1.4 K1. Relay1.2 Relay2.2 Relay3.2 Relay4.2 Relay5.2 Relay6.2 Relay7.2 Relay8.2 Relay9.2 Relay10.2 U1.3 U1.4 U1.5 U1.7 U1.8 U1.9 U1.18 U1.23 U1.24 U1.25 U1.26 U1.29 U1.30 U1.34 U1.39 U1.40 U1.41 U1.42 U1.43 U1.44 U1.45 U1.46 U1.47 U1.48 U1.51 U1.52 U1.53 U1.54 U1.55 U1.56 U1.57 U1.58 U1.59 U1.60 U1.61 U1.62 U1.65 U1.66 U1.67 U1.68 U1.69 U1.77 U1.78 U1.79 U1.80 U1.81 U1.82 U1.83 U1.84 U1.85 U1.89 U1.90 U1.95 U1.96 U1.97 U1.98
copper on no net:
  other v2: 1181.1,3740.16 5118.11,3740.16 1181.1,7874.02 5118.11,7874.02

## Polygon pours and split planes (outlines as drawn)
GND on Bottom Layer "GND_L02_P048" (solid, remove dead copper, pour order 48): 640,8460 5365,8460 5365,2910 640,2910
DGND on Bottom Layer "DGND_L02_P042" (solid, remove dead copper, pour order 42): 2205,6645 4285,6645 4285,5460 3945,5120 2210.19,5120
GND on Top Layer "GND_L01_P046" (solid, remove dead copper, pour order 46): 640,8460 5365,8460 5365,2910 640,2910
DGND on Top Layer "DGND_L01_P044" (solid, remove dead copper, pour order 44): 2205,6645 4285,6645 4285,5455 4280,5455 3945,5120 2210,5120

## Keep-outs
Keep-Out Layer:
  the board outline again, w15

## Silkscreen, mask and mechanical layers (free items; w line width, h text height)
Top Overlay:
  text "SWDIO" at 3680,6445 h35 r90
  text "3V3" at 3775,6445 h35 r90
  text "GND" at 3575,6440 h35 r90
  text "SWCLK" at 3470,6430 h35 r90
  text "L" at 4395,6150 h35 r90
  text "H" at 4405,5920 h35 r90
  text "6_RX" at 3750,5855 h35
  text "6_TX" at 3750,5760 h35
  text "DGND" at 3790,5605 h35 r90
  text "3V3" at 3790,5475 h35 r90